# Altium PCB CH32F&V208R-R0-1v1.PcbDoc (part 3 of 3)
Units mil, origin at the board's own origin, x right, y up, seen from the top; angles counter-clockwise.
Board outline 3405.51 x 3740.16 mil, 2 copper layers (Top Layer, Bottom Layer); 61 components, 89 nets, 339 pads, 976 vias.
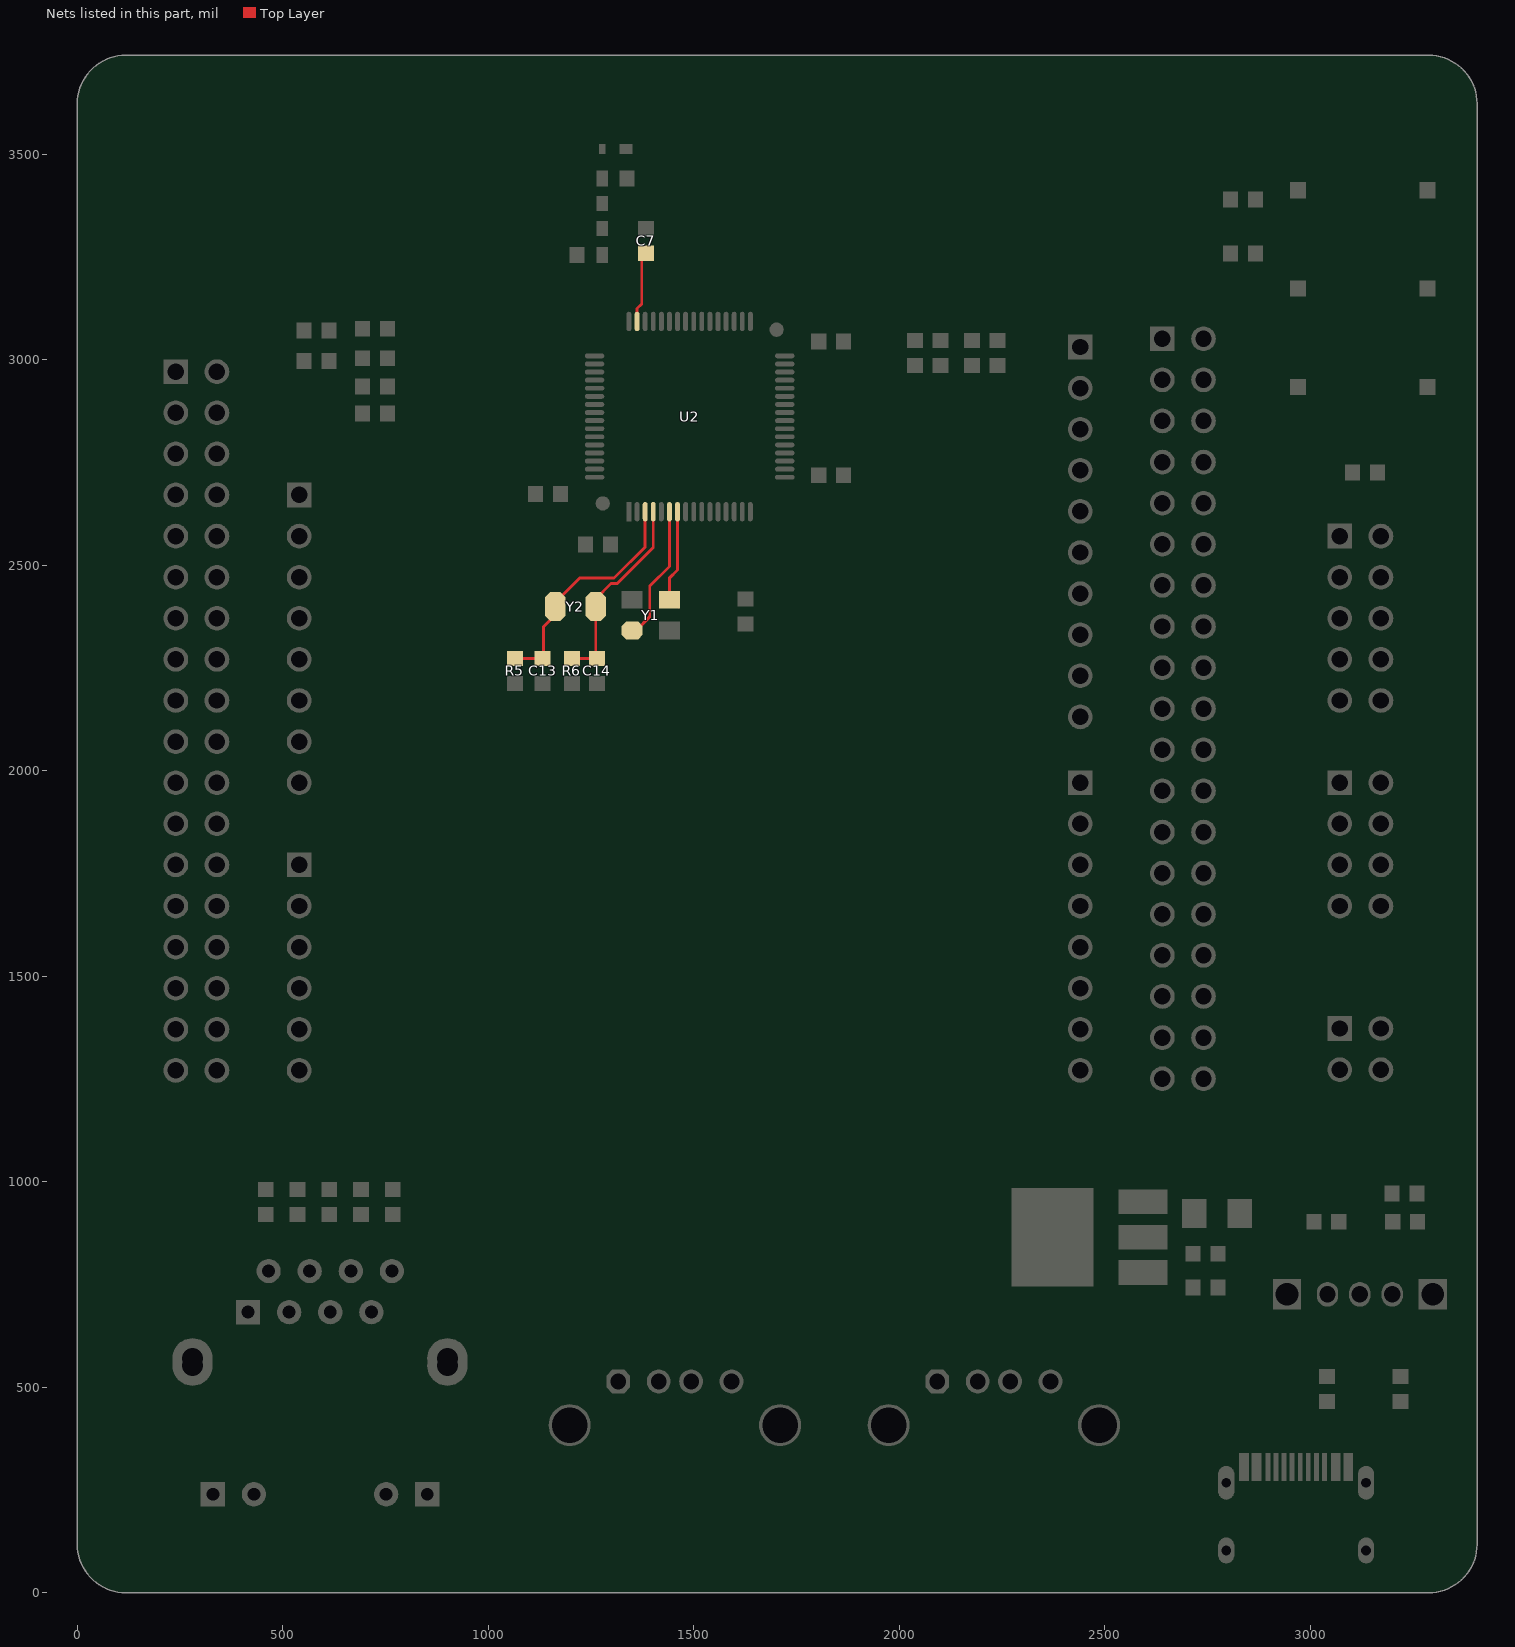
[diagram p3: the nets of this part, all layers, seen from the top]

## Via types
v1: diameter 24, hole 12, Top Layer to Bottom Layer, tented both sides, 809 vias
v2: diameter 28, hole 16, Top Layer to Bottom Layer, tented both sides, 167 vias

## Nets (pads, with @x,y where several pads share a name; then routed paths per layer and width w, separated by ;. In a path a pad name is that pad's centre, name@x,y a point inside that pad or via, vN(x,y) a via of type N, cw(c..) or ccw(c..) an arc to the next point about the centre after c; other vN are vias at no path point) (continued)
VINTA: C7.1 U2.47 | length 174.9
  Top Layer w7: U2.47@1361.82,3092.62 1361.82,3124.11 1373.17,3135.46 1373.17,3248.49 C7.1@1383.28,3258.6
X32IN: C13.2 R5.2 U2.3 Y2.1 | length 566.7
  Top Layer w7: R5.2@1075.62,2272.64 1133.15,2272.64 1134.03,2273.52 1134.03,2349.86 1162.74,2378.57 1162.74,2409.01 1222.26,2468.54 1305.96,2468.54 1381.5,2544.09 U2.3@1381.5,2629.87
X32OUT: C14.2 R6.2 U2.4 Y2.2 | length 498
  Top Layer w7: R6.2@1187.17,2272.65 1261.17,2272.65 Y2.2@1261.17,2399.01 1261.17,2417.44 1298.74,2455.01 1313.65,2455.01 1401.19,2542.56 U2.4@1401.19,2629.87
XIN: U2.6 Y1.1 | length 330.2
  Top Layer w7: Y1.1@1345.8,2341.01 Y1.1@1349.74,2341.01 ; Y1.1@1355.74,2341.01 1359.68,2341.01 1392.74,2374.08 1392.74,2449.01 1440.56,2496.83 U2.6@1440.56,2629.87
XOUT: U2.7 Y1.3 | length 293.7
  Top Layer w7: Y1.3@1460.24,2433.97 1442.09,2415.82 Y1.3@1440.29,2415.82 1440.29,2468.07 1460.24,2488.02 ; 1460.24,2531.92 1460.24,2488.02 ; U2.7@1460.24,2629.87 1460.24,2488.02
pads on no net: J1.0 J1.A8 J1.B8 J3.24 J4.21 P1.0 P2. P2.7 P5.0 S1.0 S1.3 U1. U2.0

## Polygon pours and split planes (outlines as drawn)
GND on Top Layer "GND" (hatched Horizontal grid 8 track 8, remove dead copper, pour order 3): 0,3740.16 0,0 3405.51,0 3405.51,3740.16
GND on Bottom Layer "GND" (hatched Horizontal grid 8 track 8, remove dead copper, pour order 7): 0,3740.16 0,0 3405.51,0 3405.51,3740.16

## Keep-outs
Keep-Out Layer:
  the board outline again, w10

## Other copper
Top Layer:
  rectangle net GND: 1175.2,3203.85 1247.7,3290.23
  rectangle net GND: 1305.86,3400.71 1387.1,3475.47
  rectangle net GND: 1317.76,3466.67 1353.19,3503.88
  rectangle net GND: 1305.46,3473.85 1398.16,3500.01
  pour cut-out: 1252.59,3409.07 1252.59,3316.03 1300.59,3316.03 1300.59,3409.59
Multi-Layer:
  pour cut-out: 3405.71,3496.01 0,3496.01 0,3740.16 3405.72,3740.16

## Silkscreen, mask and mechanical layers (free items; w line width, h text height)
Top Overlay:
  lines w10: 399.76,1270.54 479.76,1270.54 ; 399.76,1370.54 479.76,1370.54 ; 399.76,1470.54 479.76,1470.54 ; 399.76,1570.54 479.76,1570.54 ; 399.76,1670.54 479.76,1670.54 ; 399.76,1770.54 479.76,1770.54 ; 399.76,1970.54 479.76,1970.54 ; 399.76,2070.54 479.76,2070.54 ; 399.76,2170.54 479.76,2170.54 ; 399.76,2270.54 479.76,2270.54 ; 399.76,2370.54 479.76,2370.54 ; 399.76,2470.54 479.76,2470.54 ; 399.76,2570.54 479.76,2570.54 ; 399.76,2670.54 479.76,2670.54 ; 2499.76,1264.54 2579.36,1256.58 ; 2499.76,1364.54 2579.36,1356.58 ; 2499.76,1464.54 2579.36,1456.58 ; 2499.76,1564.54 2579.36,1556.58 ; 2499.76,1664.54 2579.36,1656.58 ; 2499.76,1764.54 2579.36,1756.58 ; 2499.76,1864.54 2579.36,1856.58 ; 2499.76,1964.54 2579.36,1956.58 ; 2499.76,2136.54 2579.36,2144.5 ; 2499.76,2236.54 2579.36,2244.5 ; 2499.76,2336.54 2579.36,2344.5 ; 2499.76,2436.54 2579.36,2444.5 ; 2499.76,2536.54 2579.36,2544.5 ; 2499.76,2636.54 2579.36,2644.5 ; 2499.76,2736.54 2579.36,2744.5 ; 2499.76,2836.54 2579.36,2844.5 ; 2499.76,2936.54 2579.36,2944.5 ; 2499.76,3036.54 2579.36,3044.5 ; 2985.7,1222.79 2985.7,1254.95 ; 2985.7,1387.38 2985.7,1424.87 ; 2985.7,1628.41 2985.7,1757.56 ; 2985.7,1883.52 2985.7,2012.67
  text "PC0" at 2799.53,3047.8 h35
  text "PB10" at 2272.68,3007.56 h32
  text "PC1" at 2799.53,2947.61 h35
  text "VDD" at 69.92,2945.9 h35
  text "VDD" at 401.03,2945.9 h35
  text "PB11" at 2265.59,2906.61 h35
  text "BOOT0" at 401.03,2847.03 h35
  text "PC2" at 2799.53,2847.42 h35
  text "BOOT1" at 18.93,2845.99 h35
  text "VDDA" at 2241.77,2806.33 h35
  text "GND" at 401.03,2749.92 h35
  text "PC3" at 2799.53,2747.22 h35
  text "GND" at 66.25,2746.09 h35
  text "GND" at 2272.59,2706.05 h35
  text "PC4" at 2799.53,2647.03 h35
  text "KEY" at 70.25,2646.18 h35
  text "PB13" at 2250.6,2605.77 h35
  text "3V3" at 601.42,2548.22 h35
  text "CLK" at 2924.4,2548.48 h32
  text "PC5" at 2799.53,2546.84 h35
  text "LED1" at 64.75,2546.28 h35
  text "TXD" at 3229.56,2544.25 h35
  text "PB14" at 2248.93,2505.49 h35
  text "NRST" at 601.42,2447.57 h35
  text "DIO" at 2939.79,2447.91 h32
  text "PC6" at 2799.53,2446.65 h35
  text "LED2" at 49.75,2446.37 h35
  text "RXD" at 3229.56,2444.2 h35
  text "PB15" at 2250.6,2405.22 h35
  text "3V3" at 601.42,2346.91 h35
  text "GND" at 2917.7,2347.33 h32
  text "ELED1" at 37.26,2346.47 h35
  text "PC7" at 2799.53,2346.46 h35
  text "GND" at 3229.56,2344.15 h35
  text "PB12" at 2250.6,2304.94 h35
  text "ELED2" at 22.26,2246.56 h35
  text "VDD" at 2921.05,2246.76 h32
  text "+5V" at 601.42,2246.26 h35
  text "PC8" at 2799.53,2246.26 h35
  text "VDD" at 3229.56,2244.1 h35
  text "PB0" at 2276.26,2204.66 h35
  text "PC14" at 38.92,2146.66 h35
  text "GND" at 601.42,2145.61 h35
  text "PC9" at 2799.53,2146.07 h35
  text "+5V" at 2909.63,2146.19 h32
  text "+5V" at 3229.56,2144.05 h35
  text "PB1" at 2291.26,2104.38 h35
  text "PC15" at 40.59,2046.75 h35
  text "PC10" at 2799.53,2045.88 h35
  text "GND" at 601.42,2044.95 h35
  text "+5V" at 3238.14,1947.61 h35
  text "PD2" at 69.92,1946.85 h35
  text "PC11" at 2799.53,1945.69 h35
  text "PA8" at 2272.59,1944.63 h35
  text "+5V" at 601.42,1944.3 h35
  text "PA15" at 40.59,1846.94 h35
  text "+5V" at 3238.14,1847.38 h35
  text "PB9" at 2277.93,1844.73 h35
  text "PC12" at 2799.53,1845.5 h35
  text "GND" at 3008.38,1765.22 h35 r90
  text "PA0" at 605.73,1748.64 h35
  text "PA14" at 38.92,1747.04 h35
  text "3V3" at 3238.14,1747.14 h35
  text "PB8" at 2276.26,1744.84 h35
  text "PC13" at 2799.53,1745.3 h35
  text "PA1" at 605.73,1648.94 h35
  text "PA13" at 40.59,1647.13 h35
  text "VDD" at 3238.14,1646.91 h35
  text "PB7" at 2276.26,1644.94 h35
  text "PB5" at 2799.53,1645.11 h35
  text "CH32F&V208R-R0-1v1" at 1166.69,1555.2 h40
  text "PA2" at 605.73,1549.23 h35
  text "PA12" at 40.59,1547.23 h35
  text "PB6" at 2277.93,1545.05 h35
  text "PB3" at 2799.53,1544.92 h35
  text "PA3" at 605.73,1449.53 h35
  text "PA11" at 55.59,1447.32 h35
  text "PB4" at 2274.59,1445.15 h35
  text "PB2" at 2799.53,1444.73 h35
  text "PA4" at 605.73,1349.83 h35
  text "VDD" at 3230.66,1348.78 h35
  text "PA7" at 66.25,1347.42 h35
  text "PA9" at 2274.26,1345.25 h35
  text "VBAT" at 2799.53,1344.53 h35
  text "3V3" at 3005.69,1273.66 h35 r90
  text "VBAT" at 3230.66,1251.39 h35
  text "PA5" at 605.73,1250.12 h35
  text "PA6" at 67.92,1247.51 h35
  text "PA10" at 2246.93,1245.36 h35
  text "GND" at 2799.53,1244.34 h35
  text "OFF" at 3022.31,573.77 h35
  text "ON" at 3156.92,573.77 h35
Mechanical 1:
  lines w10: 89.02,0 3258.38,0 ; 118.11,0 cw(c118.11,118.11) 0,118.11 0,3622.05 cw(c118.11,3622.05) 118.11,3740.16 3287.4,3740.16 cw(c3287.4,3622.05) 3405.51,3622.05 3405.51,118.04 ; 3287.4,0 ccw(c3287.4,118.11) 3405.51,118.11

## Text inside footprints (layer, text, board x,y; h text height)
D1: Top Overlay "+" at 3162.08,891.47 h40 r90
D3: Top Overlay "+" at 792.82,3014 h40 r270
D4: Top Overlay "+" at 792.82,2945 h40 r270
P1: Top Overlay "G" at 1576.04,393.94 h40; Top Overlay "V" at 1296.04,393.94 h40; Top Overlay "D+" at 1466.04,393.94 h40; Top Overlay "D-" at 1376.04,393.94 h40
P5: Top Overlay "G" at 2352.04,393.94 h40; Top Overlay "V" at 2072.04,393.94 h40; Top Overlay "D+" at 2242.04,393.94 h40; Top Overlay "D-" at 2152.04,393.94 h40